# Altium PCB SUBBOARD-aux_supply.PcbDoc (part 2 of 2)
Units mm, origin at the board's own origin, x right, y up, seen from the top; angles counter-clockwise.
Board outline 55.83 x 26.94 mm, 2 copper layers (Top Layer, Bottom Layer), stack 1.569 mm thick; 71 components, 47 nets, 177 pads, 18 vias.
Unrouted connection lines stored in the file: 1.
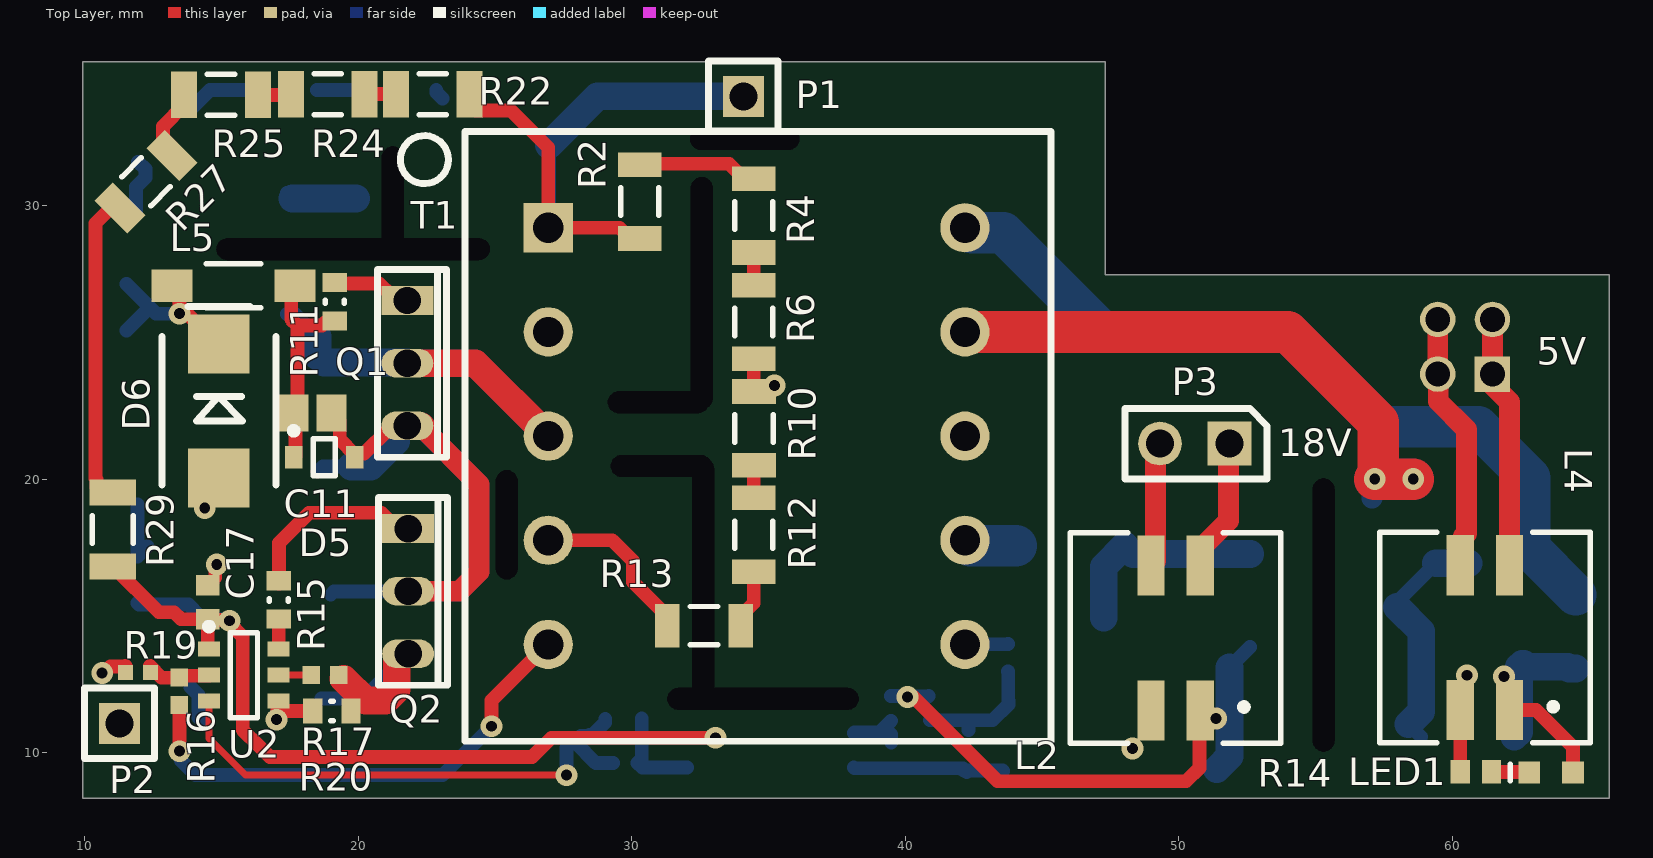
[diagram p0: Top Layer view]

## Via types
v1: diameter 0.8, hole 0.4, Top Layer to Bottom Layer, 18 vias

## Nets (pads, with @x,y where several pads share a name; then routed paths per layer and width w, separated by ;. In a path a pad name is that pad's centre, name@x,y a point inside that pad or via, vN(x,y) a via of type N, cw(c..) or ccw(c..) an arc to the next point about the centre after c; other vN are vias at no path point) (continued)
NetC15_1: C15.1 R30.1 U1.3 | length 3.5
  Bottom Layer w0.508: R30.1 30.385,9.445 U1.3 ; R30.1@30.231,9.641 30.365,9.775 C15.1
NetD1_1: D1.1 D1.3 T1.7 | length 1.9
  Bottom Layer w0.508: T1.7 T1.7@42.38,17.567
  Bottom Layer w1.524: T1.7@42.38,17.567 44.05,17.567
NetD2_2: D2.2 D3.2 | length 2.6
  Bottom Layer w0.508: D3.2@17.39,30.46 D3.2@17.59,30.26
  Bottom Layer w1.016: D3.2@17.59,30.26 D2.2@19.91,30.26
NetD4_1: D4.1 D4.3 T1.9 | length 21.4
  Top Layer w1.524: T1.9 53.998,25.383 57.297,22.084 57.297,20.122 v1(57.175,20) v1(58.582,20)
  Bottom Layer w0.762: D4.1 D4.1@57.075,19.305
  Bottom Layer w1.524: v1(57.175,20) v1(58.582,20)
NetD7_2: D7.2 R26.1 | length 1.5
  Bottom Layer w0.508: D7.2 14.154,12.101 14.154,11.276 14.25,11.18 R26.1
NetLED1_1: LED1.1 R14.1 | length 1.4
  Top Layer w0.508: R14.1 61.462,9.287 62.813,9.287 LED1.1
NetR2_1: R2.1 R4.2 | length 4.4
  Top Layer w0.508: R2.1 30.325,31.535 33.563,31.535 34.11,30.988 R4.2
NetR3_1: R3.1 R5.2 | length 1.7
  Bottom Layer w0.508: R5.2@18.49,34.23 R3.1@20.15,34.23
NetR4_1: R4.1 R6.2 | length 1.2
  Top Layer w0.508: R6.2 R4.1
NetR5_1: R5.1 R7.2 | length 2.2
  Bottom Layer w0.508: R7.2@13.855,33.515 14.57,34.23 R5.1@15.79,34.23
NetR7_1: R7.1 R9.2 | length 2.1
  Bottom Layer w0.508: R9.2 11.872,29.752 11.872,30.689 12.211,31.028 12.211,31.34 R7.1@11.945,31.605
NetR10_1: R10.1 R12.2 | length 1.2
  Top Layer w0.508: R12.2 34.46,20.494 R10.1
NetR12_1: R12.1 R13.2 | length 2.2
  Top Layer w0.508: R13.2 33.99,14.99 34.46,15.46 R12.1
NetR21_2: R21.2 R23.1 U1.1 | length 3.2
  Bottom Layer w0.508: R21.2 39.056,10.736 38.141,10.736 U1.1 39.43,10.715 39.49,10.655 R23.1
NetR22_1: R22.1 R24.2 | length 1.1
  Top Layer w0.508: R24.2 R22.1
NetR24_1: R24.1 R25.2 | length 1.2
  Top Layer w0.508: R25.2 17.5,34.05 R24.1
NetR25_1: R25.1 R27.2 | length 2.7
  Top Layer w0.508: R27.2 13.189,32.142 12.848,32.483 12.848,32.903 13.62,33.675 R25.1
NetR27_1: R27.1 R29.2 | length 11.5
  Top Layer w0.508: R29.2 10.645,19.51 10.424,19.731 10.424,19.983 10.378,20.029 10.378,29.358 R27.1@11.205,30.185
S_bot: C13.1 Q2.3 R17.1 R20.2 | length 8.1
  Top Layer w1.016: R17.1@19.46,12.7 20.26,11.9 20.997,11.9 21.404,12.307 21.404,13.571 21.443,13.61 Q2.3
  Bottom Layer w0.508: C13.1@18.654,11.982 20.192,11.982 21.307,13.097 21.307,13.337 21.566,13.596 Q2.3@21.806,13.596
V_Aux: R16.1 R26.2 T1.5 | length 18.2
  Top Layer w0.508: R16.1 13.455,11.735 13.455,10.053 v1(13.46,10.048) ; v1(24.87,10.96) 24.87,11.909 26.914,13.953 T1.5
  Bottom Layer w0.508: v1(13.46,10.048) 13.516,9.992 13.516,9.704 14.044,9.176 23.086,9.176 v1(24.87,10.96)
VCC_5V: C6.2 L3.2 L4.1 LED1.2 R8.1 | length 8.6
  Top Layer w0.508: L4.1 63.075,11.55 64.425,10.2 LED1.2
  Bottom Layer w1.016: L3.2 62.45,10.75 62.45,13.133 62.567,13.25 62.625,13.25 62.742,13.133 64.233,13.133 64.291,13.075 R8.1
  other v1: 61.9,12.775
VCC_18V: C2.2 L1.2 L2.1 R1.1 R18.1 R21.1 | length 19.9
  Top Layer w0.508: v1(40.09,12.03) 40.298,12.03 43.378,8.95 50.28,8.95 50.76,9.43 50.76,10.75 L2.1@50.82,10.81
  Bottom Layer w0.508: R21.1 39.49,12.07 v1@40.09,12.07 ; v1(40.09,12.03) 40.11,12.05 40.84,12.05 R18.1 ; L1.2@51.865,13.114 52.611,13.86 L1.2@52.62,13.86
  Bottom Layer w1.016: R1.1 51.865,9.86 L1.2@51.865,13.114
  other v1: 51.37,11.24
VCCo_5V: J1.3 J1.4 L4.3 | length 9.4
  Top Layer w0.508: L4.3 L4.3@60.525,17.075
  Top Layer w0.762: J1.3 59.497,23.822 59.497,22.847 60.525,21.819 60.525,18.015 60.419,17.909 L4.3@60.419,17.075 ; J1.3@59.479,23.992 J1.4
VCCo_18V: L2.3 P3.2 | length 5.2
  Top Layer w0.508: L2.3@48.99,17.44 L2.3 L2.3@49.155,17.005 ; P3.2@49.155,21.136 P3.2
  Top Layer w0.762: L2.3@49.155,17.005 P3.2@49.155,21.136
VDD: C16.2 C17.1 D7.1 R29.1 U1.4 U2.1 | length 32
  Top Layer w0.254: U2.1@14.49,13.825 U2.1
  Top Layer w0.508: R29.1 12.7,15.13 13.251,15.13 13.506,14.875 C17.1 ; U2.1@14.49,13.825 C17.1 ; v1(33.06,10.54) 27.06,10.54 26.35,9.83 16.77,9.83 16.37,10.23 16.365,10.23 15.77,10.825 15.77,14.251 15.28,14.741 v1(15.28,14.82) 15.252,14.847 14.517,14.847 C17.1
  Bottom Layer w0.508: C16.2 11.983,15.408 13.782,15.408 14.216,14.974 14.231,14.974 14.329,14.876 15.224,14.876 v1(15.28,14.82)
VFB: C14.1 R18.2 R28.1 U3.4 | length 4.4
  Bottom Layer w0.508: R18.2@40.91,11.18 43.2,11.18 43.78,11.76 43.78,11.885 43.77,11.895 43.77,12.96 R28.1 ; C14.1@42.32,10.83 C14.1@42.32,10.855
VS: R16.2 R19.1 U2.2 | length 2.4
  Top Layer w0.508: R19.1@12.38,13.16 12.805,12.735 13.445,12.735 R16.2 13.519,12.809 14.514,12.809 U2.2
pads on no net: T1.2 T1.8 U3.1 U3.2

## Polygon pours and split planes (outlines as drawn)
GND on Bottom Layer "Poly_GND_Bot" (solid, remove dead copper, pour order 1): 31.05,19.58 26.8,19.58 26.8,15.4 24.82,13.42 18.398,13.42 17.888,12.889 16.525,12.889 16.13,13.252 16.13,18.23 14.64,19.72 10.48,19.72 10.05,19.29 10.05,9.57 11.08,8.54 26.06,8.54 31.05,13.53
GND_18V on Bottom Layer "Poly_GND_18V_Bot1" (solid, pour order 6): 40.87,14.81 40.87,13.42 41.85,12.44 44.72,12.44 45.01,12.15 45.01,11.24 45.9,10.35 47.48,10.35 49.24,8.59 52.83,8.59 54.66,10.42 54.66,18.23 52.13,19.27 45.58,19.27 45.19,18.88 45.19,16.46 44.02,15.29 41.35,15.29
HV_Pos on Bottom Layer "Poly_HP_HV_Pos_Bot1" (solid, pour order 4): 31.27,23.52 29.87,23.52 29.87,27.65 29.35,28.17 25.86,28.17 25.66,28.37 25.67,28.38 25.67,28.67 25.31,29.03 22.24,29.03 21.88,29.39 21.88,34.68 22.22,35.02 27.28,35.02 31.27,31.03
GND_5V on Bottom Layer "GND_5V_L-01_P-001" (solid, pour order 7): 56.15,17.8 56.175,17.775 65.375,17.775 65.375,8.85 65.225,8.7 57.075,8.7 56.1,9.675 56.1,17.825
HV_Mid on Bottom Layer "Poly_HV_Mid_Bot" (solid, pour order 3): 33.68,30.92 35.15,30.92 35.15,12.93 34.91,12.69 33.68,12.69
no net on Bottom Layer "NONET_L-01_P-001" (solid, pour order 2): 48.36,51.48

## Silkscreen, mask and mechanical layers (free items; w line width, h text height)
Top Overlay:
  text "5V" at 63.103,24.177 h1
  text "18V" at 53.648,20.836 h1
Bottom Overlay:
  text "AHWV/LSZ" at 38.16,21.85 h1 r270
  text "300V-1kV in" at 24.12,16.65 h1 r270
  text "F-IT 18I0090" at 36.48,15.43 h1 r270
  text "v. 1.0" at 38.12,15.31 h1 r270
  text "HV Aux. Supply" at 39.963,15.31 h1 r270
Board:
  the board outline again, w0.254
Mechanical 15:
  lines w2: 11.26,11.058 11.26,11.18

## Dimensions
34.08,34 to 9.92,35.27 on Dimensions
11.219,11.128 to 9.92,35.27 on Dimensions
65.75,27.475 to 65.75,8.325 on Dimensions